# Altium PCB driver_sapog_compact.PcbDoc (part 2 of 2)
Units mil, origin at the board's own origin, x right, y up, seen from the top; angles counter-clockwise.
Board outline 2630 x 2261.5 mil, 4 copper layers (Top Layer, Mid-Layer 1, Mid-Layer 2, Bottom Layer); 113 components, 104 nets, 394 pads, 280 vias.
Unrouted connection lines stored in the file: 128.
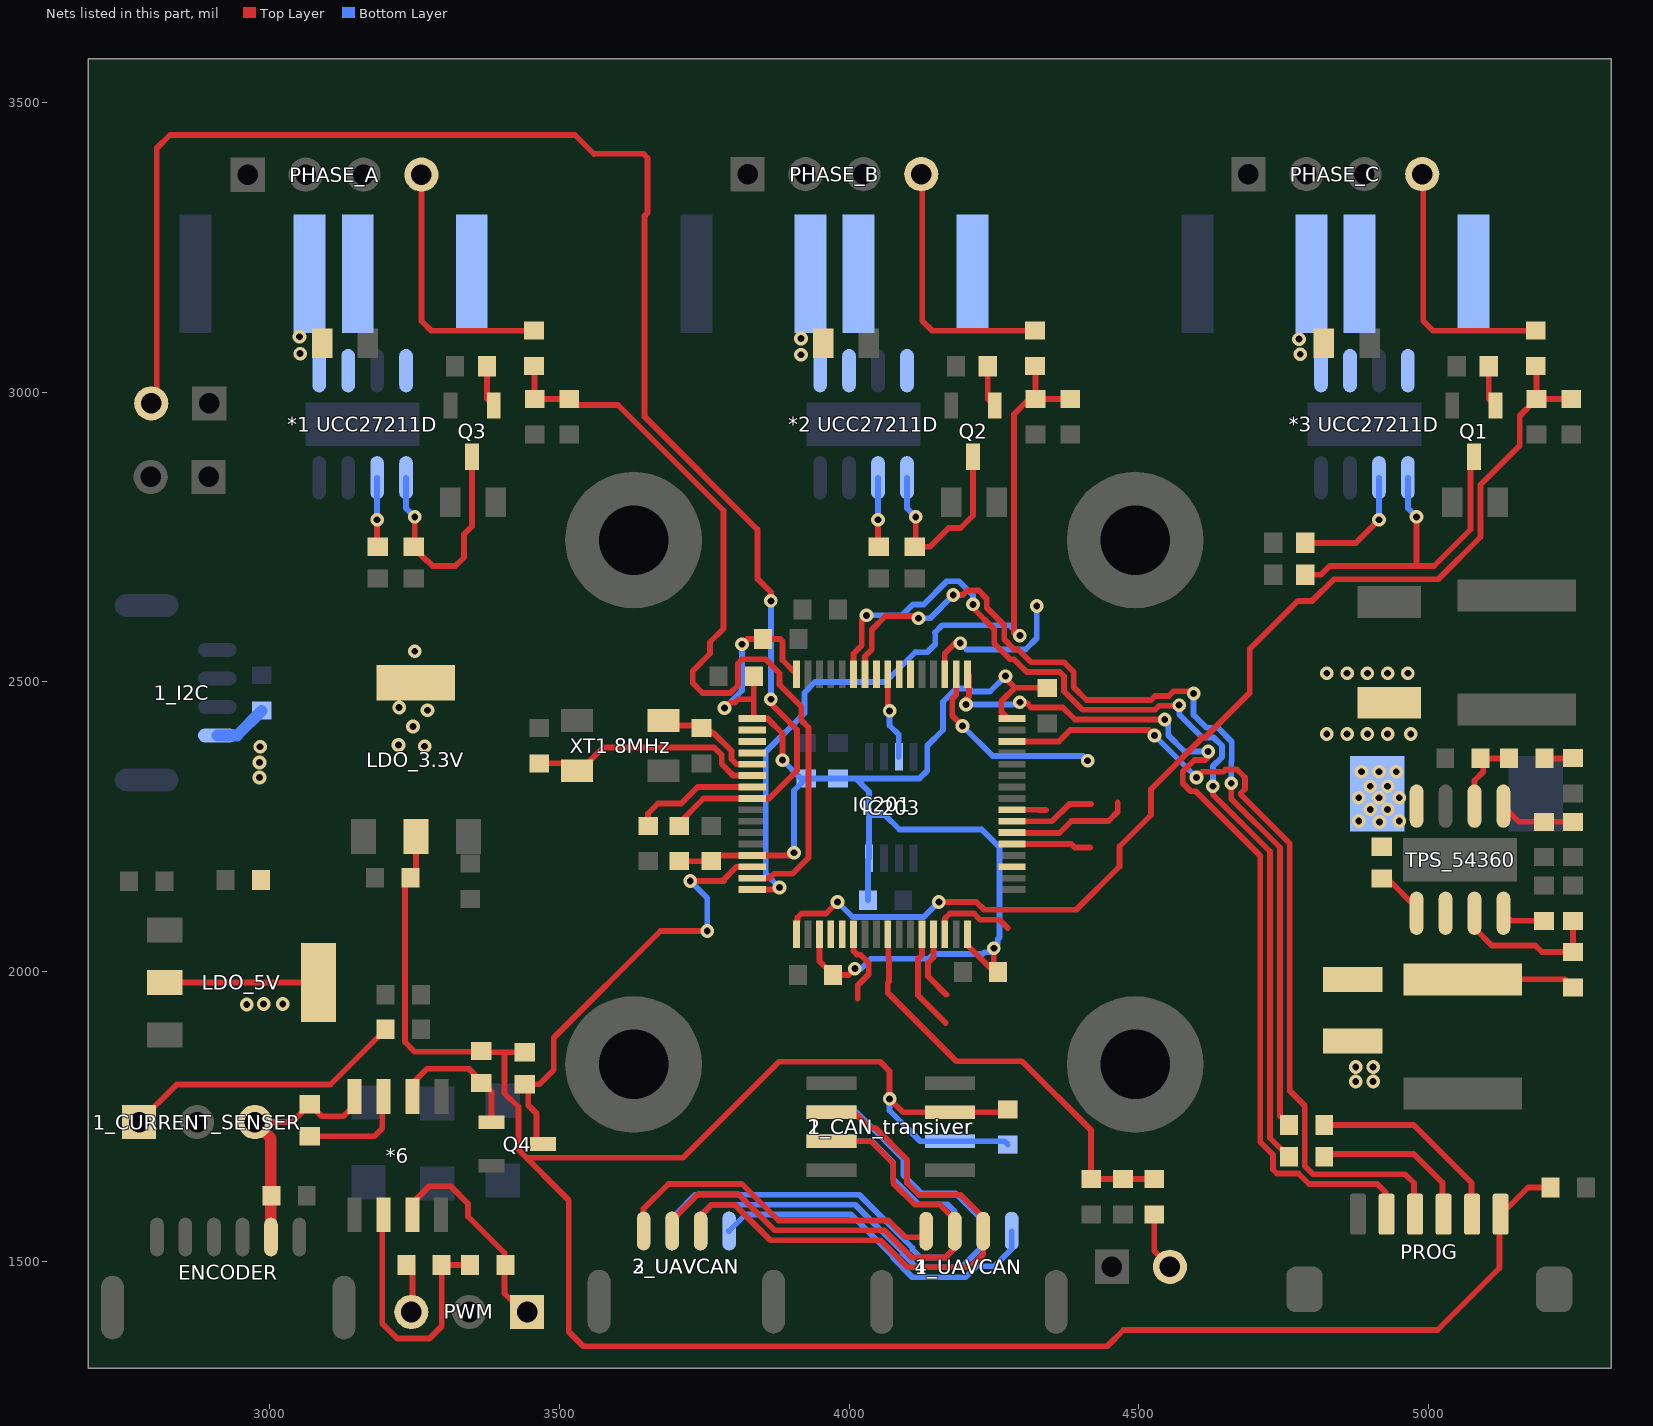
[diagram p2: the nets of this part, all layers, seen from the top]

## Via types
v1: diameter 23.62/0/23.62/23.62 (per signal layer), hole 11.81, Top Layer to Bottom Layer, 278 vias
v2: diameter 39.37, hole 39.37, Top Layer to Bottom Layer, tented both sides, 2 vias

## Nets (pads, with @x,y where several pads share a name; then routed paths per layer and width w, separated by ;. In a path a pad name is that pad's centre, name@x,y a point inside that pad or via, vN(x,y) a via of type N, cw(c..) or ccw(c..) an arc to the next point about the centre after c; other vN are vias at no path point) (continued)
Net1_CAN_transiver_6: 1_CAN_transiver.6 1_UAVCAN.3 2_UAVCAN.3 | length 1001.1
  Top Layer w10: 2_UAVCAN.3@3743.61,1551.88 3743.61,1578.61 3762.35,1597.35 3802.68,1597.35 3864.03,1536 4054.22,1536 4101.11,1489.11 4209.1,1489.11 4231.61,1511.61 1_UAVCAN.3@4231.61,1551.57 4231.61,1575.39 4192.97,1614.04 4120.92,1614.04 4100,1634.96 4100,1675 4045,1730 4035,1730 4008,1757 1_CAN_transiver.6@3969.64,1757
Net1_CAN_transiver_7: 1_CAN_transiver.7 1_UAVCAN.2 2_UAVCAN.2 | length 915.7
  Top Layer w10: 2_UAVCAN.2@3694.39,1551.88 3694.39,1570.39 3740,1616 3808.07,1616 3871.07,1553 4061.26,1553 4108.15,1506.11 4166.1,1506.11 4181.1,1521.11 4181.1,1550.29 1_UAVCAN.2@4182.39,1551.57 4182.39,1571.6 4156.95,1597.04 4113.88,1597.04 4076.39,1634.53 4076.39,1668.61 4038,1707 1_CAN_transiver.7@3969.64,1707
Net1_CURRENT_SENCE_1: 1_CURRENT_SENSER.1 R27.1 | length 491.8
  Top Layer w10: 1_CURRENT_SENSER.1@2774,1740 2839,1805 3104.49,1805 R27.1@3199.49,1900
Net1_UAVCAN_1: 1_UAVCAN.1 2_UAVCAN.1 | length 586.5
  Top Layer w10: 2_UAVCAN.1@3645.18,1551.88 3645.18,1590.18 3688,1633 3815.12,1633 3878.12,1570 4068.3,1570 4097.3,1541 4122.61,1541 1_UAVCAN.1@4133.18,1551.57
Net2_CAN_transiver_6: 2_CAN_transiver.6 3_UAVCAN.3 4_UAVCAN.3 | length 926.4
  Bottom Layer w10: 3_UAVCAN.3@3694.39,1551.88 3700.53,1551.88 3700.53,1580.54 3734.35,1614.35 4017.65,1614.35 4109.37,1522.63 4109.37,1520.05 4123.32,1506.11 4166.1,1506.11 4182.39,1522.39 4_UAVCAN.3@4182.39,1551.57 4182.39,1585.61 4170,1598 4120,1598 4076.39,1641.61 4076.39,1669.57 4038.96,1707 2_CAN_transiver.6@3969.64,1707
Net2_CAN_transiver_7: 2_CAN_transiver.7 3_UAVCAN.2 4_UAVCAN.2 | length 984.3
  Bottom Layer w10: 3_UAVCAN.2@3743.61,1551.88 3745.53,1551.88 3745.53,1580.54 3762.35,1597.35 4010.61,1597.35 4092.37,1515.59 4092.37,1513.01 4116.28,1489.11 4194.1,1489.11 4231.61,1526.61 4_UAVCAN.2@4231.61,1551.57 4231.61,1569.39 4183.96,1617.04 4125,1617.04 4093.39,1648.65 4093.39,1676.61 4013,1757 2_CAN_transiver.7@3969.64,1757
Net3_UAVCAN_1: 3_UAVCAN.1 4_UAVCAN.1 | length 597.1
  Bottom Layer w10: 3_UAVCAN.1@3792.82,1551.88 3821.28,1580.35 4003.57,1580.35 4075.37,1508.55 4075.37,1505.97 4109.23,1472.11 4201.15,1472.11 4220.04,1491 4251,1491 4280.82,1520.82 4_UAVCAN.1@4280.82,1551.57
"Net*1 UCC27211D_1": "*1 UCC27211D.1" C30.1 L6.1
  other v1: 3052,3067 3051,3096
"Net*1 UCC27211D_2": "*1 UCC27211D.2" C31.1
"Net*1 UCC27211D_5": "*1 UCC27211D.5" Q3.3 R21.1 | length 413.5
  Top Layer w10: v1(3250,2785) 3250,2735.56 R21.1@3248,2733.56 3248,2732 3270.81,2709.19 3271.93,2709.19 3281.12,2700 3320,2700 3335,2715 3335,2755 3349,2769 Q3.3@3349,2888.71
  Bottom Layer w10: 3235,2852.48 3235,2800 v1(3250,2785)
"Net*1 UCC27211D_6": "*1 UCC27211D.6" R22.1 | length 119.3
  Top Layer w10: v1(3185,2780) 3185,2734.56 R22.1@3186,2733.56
  Bottom Layer w10: v1(3185,2780) 3185,2852.48
"Net*2 UCC27211D_1": "*2 UCC27211D.1" C25.1 L4.1
  other v1: 3917,3065 3917,3093
"Net*2 UCC27211D_2": "*2 UCC27211D.2" C27.1
"Net*2 UCC27211D_5": "*2 UCC27211D.5" Q2.3 R16.1 | length 335.8
  Top Layer w10: v1(4115,2785) 4115,2735.56 R16.1@4113,2733.56 4139.56,2733.56 4172,2766 4192.54,2766 4214,2787.46 Q2.3@4214,2874
  Bottom Layer w10: 4100,2852.48 4100,2800 v1(4115,2785)
"Net*2 UCC27211D_6": "*2 UCC27211D.6" R17.1 | length 119.3
  Top Layer w10: v1(4050,2780) 4050,2734.56 R17.1@4051,2733.56
  Bottom Layer w10: v1(4050,2780) 4050,2852.48
"Net*3 UCC27211D_1": "*3 UCC27211D.1" C21.1 L2.1
  other v1: 4779,3066 4777,3092
"Net*3 UCC27211D_2": "*3 UCC27211D.2" C22.1
"Net*3 UCC27211D_5": "*3 UCC27211D.5" Q1.3 R11.1 | length 604.6
  Top Layer w10: R11.1@4787.56,2685 4815,2685 4830,2700 4980,2700 ; v1(4980,2785) 4980,2700 ; Q1.3@5079,2888.71 5073.28,2882.99 5073.28,2763.28 5010,2700 4980,2700
  Bottom Layer w10: 4965,2852.48 4965,2800 v1(4980,2785)
"Net*3 UCC27211D_6": "*3 UCC27211D.6" R12.1 | length 216.5
  Top Layer w10: R12.1@4787.56,2740 4875,2740 v1(4915,2780)
  Bottom Layer w10: v1(4915,2780) 4915,2852.48
Net*6_2: *6.2 C33.2 R31.2 | length 449.8
  Top Layer w10: *6.2@3192.49,1561.49 3194,1563 3194,1392 3220,1366 3275,1366 3296.51,1387.51 R31.2@3296.51,1493 C33.2@3345.49,1493
Net*6_3: *6.3 C33.1 PWM.1 | length 397.3
  Top Layer w10: *6.3@3244,1563 3244,1598 3275,1629 3312,1629 3342,1599 3342,1577 3405,1514 3405,1444 PWM.1@3446,1403
Net*6_6: *6.6 Q4.1 R30.2 | length 257.5
  Top Layer w10: *6.6@3244,1767 3244,1804.96 3271.04,1832 3343.44,1832 3382.71,1792.73 Q4.1@3382.71,1739.4
Net*6_7: *6.7 R29.2 | length 168.6
  Top Layer w10: R29.2@3069,1715.44 3180.44,1715.44 3194,1729 *6.7@3194,1767
NetC1_1: C1.1 TPS_54360.1 | length 90.4
  Top Layer w10: C1.1@4920,2160.44 4929.56,2160.44 4980,2110 TPS_54360.1@4980,2100.48
NetC1_2: C1.2 D1.2 L1.1 TPS_54360.8
  other v1: 4916,2258 4880,2260 4950,2260 4900,2280 4930,2280 4880,2300 4915,2300 4950,2300 4900,2320 4930,2320 4885,2345 4915,2345 4945,2345 4825,2410 4860,2410 4895,2410 4930,2410 4970,2410 4825,2515 4860,2515 4895,2515 4930,2515 4965,2515
NetC4_2: C4.2 R1.1 R2.2 TPS_54360.2 | length 195.8
  Top Layer w10: C4.2@5060,1986.43 5236.06,1986.43 R2.2@5250,1972.49
NetC6_1: C6.1 R3.2 TPS_54360.6 | length 139.5
  Top Layer w10: TPS_54360.6@5080,2285.52 5080,2330 5095,2345 5095,2363.51 C6.1@5090.51,2368 R3.2@5139.49,2368
NetC7_1: C7.1 R3.1 | length 49.7
  Top Layer w10: R3.1@5200.51,2368 5249.49,2368 C7.1@5250,2368.51
NetPROG_2: PROG.2 R200.1 | length 353.5
  Top Layer w10: R200.1@4820.51,1735 4975,1735 5075,1635 5075,1579.04 PROG.2@5073.82,1577.86
NetPROG_3: PROG.3 R201.1 | length 284.2
  Top Layer w10: R201.1@4820.51,1680 4825.51,1685 4975,1685 5024.61,1635.39 PROG.3@5024.61,1577.86
NetPWM_3: PWM.3 R31.1 | length 94.4
  Top Layer w10: R31.1@3235.49,1493 3246,1482.49 PWM.3@3246,1403
NetQ1_1: Q1.1 R14.1 | length 72.6
  Top Layer w10: R14.1@5104.56,3045 5104.56,2989.13 Q1.1@5116.4,2977.29
NetQ2_1: Q2.1 R19.1 | length 72.6
  Top Layer w10: R19.1@4239.56,3045 4239.56,2989.13 Q2.1@4251.4,2977.29
NetQ3_1: Q3.1 R25.1 | length 72.6
  Top Layer w10: R25.1@3374.56,3045 3374.56,2989.13 Q3.1@3386.4,2977.29
NetR2_1: R2.1 R7.2 TPS_54360.3 | length 266.6
  Top Layer w10: TPS_54360.3@5080,2100.48 5080,2075 5110,2045 5185,2045 5196.49,2033.51 R2.1@5250,2033.51 R7.2@5250,2087.49
NetR4_1: R4.1 R6.2 TPS_54360.5 | length 131.2
  Top Layer w10: TPS_54360.5@5130,2285.52 5157.01,2258.51 R4.1@5250,2258.51
NetR5_1: R5.1 TPS_54360.4 | length 75.4
  Top Layer w10: TPS_54360.4@5130,2100.48 5142.99,2087.49 R5.1@5200,2087.49
NRST: IC201.7 R8.2 | length 219.9
  Top Layer w10: R8.2@3653,2251.51 3653,2273 3670,2290 3710,2290 3738.53,2318.53 IC201.7@3832.59,2318.53
OSC_IN_STM: "XT1 8MHz.3" C12.2 IC201.5 | length 186.8
  Top Layer w10: 3685.8,2434.31 3695.11,2425 3750.51,2425 3764.01,2411.5 3766.5,2411.5 3796.97,2381.03 3796.97,2366.7 3805.77,2357.9 IC201.5@3832.59,2357.9
OVER_T: IC201.8 R205.1 TERMO_FUSE.2 | length 2731.3
  Top Layer w10: TERMO_FUSE.2@2785,2987 2804.53,3006.53 2804.53,3421.53 2827.53,3444.53 3526.59,3444.53 3559.57,3411.54 3560.03,3412 3644.97,3412 3652,3404.97 3652,3310.03 3646.97,3305 3646.97,2958.03 3842,2763 3842,2678 3865,2655 v1(3865,2640) ; R205.1@3707,2251.51 3707,2257 3748.84,2298.84 IC201.8@3832.59,2298.84 3862.05,2298.84 3910,2346.79 3910,2417.28 3865,2462.28 v1(3865,2470)
  Bottom Layer w10: v1(3865,2470) v1(3865,2640)
PA_6: IC201.22 | length 133.5
  Top Layer w10: IC201.22@4007.79,2064.59 4007.79,2035.21 4014.19,2028.81 4019.86,2028.81 4033.81,2014.86 4033.81,1995.14 4015,1976.33 4015,1953
PA_15: IC201.50 | length 340.4
  Top Layer w10: IC201.50@4184.95,2513.41 4184.95,2477.62 4178.19,2470.86 4178.19,2441.81 v1(4196,2424)
  Bottom Layer w10: v1(4196,2424) 4248,2372 4404,2372 v1(4412,2364)
PB_2: IC201.28 | length 176.2
  Top Layer w10: IC201.28@4125.9,2064.59 4125.9,2028.62 4119.19,2021.9 4119.19,1958.81 4167,1911
PB_3: IC201.55
PB_5: IC201.57
PB_10: IC201.29 | length 121.7
  Top Layer w10: IC201.29@4145.58,2064.59 4145.58,2024.25 4136.19,2014.86 4136.19,1991.81 4168,1960
PB_11: IC201.30 | length 149.6
  Top Layer w10: IC201.30@4165.27,2064.59 4165.27,2091.41 4174.07,2100.21 4215.52,2100.21 4226.27,2089.45 4259.55,2089.45 4274,2075
PB_14: IC201.35
PC_6: IC201.37 | length 137.1
  Top Layer w10: IC201.37@4281.41,2220.1 4383.57,2220.1 4389.67,2214 4416,2214
PC_7: IC201.38 | length 214.1
  Top Layer w10: IC201.38@4281.41,2239.79 4282.01,2239.19 4363.19,2239.19 4384,2260 4448,2260 4464,2276 4464,2292
PC_8: IC201.39 | length 148.8
  Top Layer w10: IC201.39@4281.41,2259.47 4350.47,2259.47 4380,2289 4418,2289
PC_10: IC201.51 | length 270
  Top Layer w10: IC201.51@4165.27,2513.41 4165.27,2549.27 4183,2567 v1(4192,2567)
  Bottom Layer w10: v1(4192,2567) 4202.81,2556.19 4304.86,2556.19 4324,2575.33 v1(4324,2631)
PC_13: IC201.2
PC_14: IC201.3
PC_15: IC201.4
PD_2: IC201.54
PHASE_A: "*1 UCC27211D.4" C31.2 PHASE_A.4 R23.1 | length 454
  Top Layer w10: PHASE_A.4@3261.5,3376 3261.5,3123.5 3278.49,3106.51 R23.1@3456,3106.51
PHASE_B: "*2 UCC27211D.4" C27.2 PHASE_B.4 R18.1 | length 454
  Top Layer w10: PHASE_B.4@4126.5,3376 4126.5,3123.5 4143.49,3106.51 R18.1@4321,3106.51
PHASE_C: "*3 UCC27211D.4" C22.2 PHASE_C.4 R13.1 | length 454
  Top Layer w10: PHASE_C.4@4991.5,3376 4991.5,3123.5 5008.49,3106.51 R13.1@5186,3106.51
PWM_ext: IC201.14 Q4.3 R28.2 | length 791.3
  Top Layer w10: Q4.3@3471.29,1702 3460,1713.29 3460,1755 3446,1769 3446,1799.25 R28.2@3440,1805.25 3465.25,1805.25 3490,1830 3490,1885.58 3674.42,2070 v1(3755,2070) ; v1(3725.75,2156.19) 3783.81,2156.19 3782.52,2157.48 3805.77,2180.73 IC201.14@3832.59,2180.73
  Bottom Layer w10: v1(3725.75,2156.19) 3755,2126.94 v1(3755,2070)
PWM_OUT: IC201.40 | length 58.7
  Top Layer w10: IC201.40@4281.41,2279.16 4326.84,2279.16 4327,2279 4340,2279
Q0: "XT1 8MHz.1" C13.2 IC201.6 | length 412.6
  Top Layer w10: C13.2@3465,2359.49 3517.4,2359.49 3530.2,2346.69 ; 3536.2,2347.69 3575.48,2386.98 3766.98,2386.98 3779.97,2373.99 3779.97,2358.24 3800,2338.21 IC201.6@3832.59,2338.21
SENSE_A: C32.1 IC201.15 R23.2 R24.2 | length 1447.7
  Top Layer w10: R23.2@3456,3045.49 3457,3044.49 R24.2@3457,2988.51 C32.1@3517,2988.51 3527.49,2978.02 3600.98,2978.02 3783,2796 3783,2592.04 3760,2569.04 3760,2549 3730,2519 3730,2497.98 3746.98,2480.99 3794.95,2480.99 3808.02,2494.06 3808.02,2531.98 3815.05,2539.01 3855.97,2539.01 3880,2514.98 3880,2495 3917.5,2457.5 3917.5,2433.83 3930,2421.33 3930,2196.33 3902.48,2168.81 3870.14,2168.81 3862.38,2161.05 IC201.15@3832.59,2161.05
SENSE_B: C28.1 IC201.16 R18.2 R20.2 | length 1418.9
  Top Layer w10: IC201.16@3832.59,2141.36 3876.36,2141.36 v1(3880,2145) ; v1(4295,2580) 4289.43,2580 4284.81,2584.62 4284.81,2605.03 4284.72,2605.13 4284.72,2962.37 4310.86,2988.51 R20.2@4322,2988.51 ; R18.2@4321,3045.49 4322,3044.49 R20.2@4322,2988.51 ; C28.1@4382,2988.51 R20.2@4322,2988.51
  Bottom Layer w10: v1(3880,2145) 3856.19,2168.81 3856.19,2379.43 3922.81,2446.05 3922.81,2481.48 3941.33,2500 4063.08,2500 4114.7,2551.62 4115.14,2551.19 4134.86,2551.19 4148.81,2565.14 4148.81,2584.86 4148.38,2585.3 4161.08,2598 4277,2598 v1(4295,2580)
SENSE_C: C23.1 IC201.17 R13.2 R15.2 | length 2001.3
  Top Layer w10: IC201.17@3909.36,2064.59 3909.36,2087.19 3910.27,2087.19 3911.14,2088.06 3911.14,2093.18 3918.17,2100.21 3960.21,2100.21 v1(3980,2120) ; v1(4155,2120) 4219.77,2120 4233.31,2106.45 4392.37,2106.45 4467,2181.08 4467,2215.99 4521.19,2270.18 4521.19,2314.86 4607.36,2401.03 4607.36,2403.81 ; 4608.75,2402.42 4610.14,2403.81 4614.4,2403.81 4692,2481.41 4692,2557 4775,2640 4800,2640 4837.5,2677.5 5017.5,2677.5 5090.28,2750.28 5090.28,2840.56 5157.99,2908.27 5157.99,2959.5 R15.2@5187,2988.51 ; R13.2@5186,3045.49 5187,3044.49 R15.2@5187,2988.51 ; C23.1@5247,2988.51 R15.2@5187,2988.51
  Bottom Layer w10: v1(3980,2120) 4006.01,2093.99 4128.99,2093.99 v1(4155,2120)
SENSE_CURRENT: IC201.21
SENSE_VIN: IC201.20
SWCLK: IC201.49 PROG.5 | length 1594.7
  Top Layer w10: v1(4202,2461) 4202,2469.96 4206.98,2474.94 4206.98,2511.07 IC201.49@4204.64,2513.41 ; v1(4295,2465) 4305,2465 4314.02,2455.98 4369.02,2455.98 4390,2435 v1(4545,2435) ; v1(4620,2380) 4620,2370 4615,2365 4596.33,2365 4576.19,2344.86 4576.19,2325.14 4590.14,2311.19 4598.81,2311.19 4710,2200 4710,1705.45 4732,1683.45 4732,1658.02 4739.03,1650.99 4776.01,1650.99 4794,1633 4912,1633 4926.18,1618.82 PROG.5@4926.18,1577.86
  Bottom Layer w10: v1(4202,2461) 4291,2461 v1(4295,2465) ; v1(4545,2435) 4551.19,2428.81 4551.19,2407.85 4579.04,2380 v1(4620,2380)
SWDIO: IC201.46 PROG.4 | length 1436.3
  Top Layer w10: IC201.46@4281.41,2397.27 4362.27,2397.27 4382,2417 4518,2417 v1(4527.38,2407.62) v1@4530,2405 ; v1(4600,2335) 4610,2345 4646.33,2345 4650.14,2348.81 4669.86,2348.81 4683.81,2334.86 4683.81,2315.14 4677,2308.33 4677,2305.12 4761,2221.12 4761,1794 4786.98,1768.02 4786.98,1664.06 4801.04,1650 4960,1650 4975.39,1634.61 PROG.4@4975.39,1577.86
  Bottom Layer w10: v1(4527.38,2407.62) v1(4600,2335)
TSENS_OS: IC201.56 IC203.3 | length 150.7
  Top Layer w10: IC201.56@4066.84,2513.41 4066.84,2453.16 v1(4070,2450)
  Bottom Layer w10: v1(4070,2450) 4070,2425 4085.8,2409.2 IC203.3@4085.8,2370.6
USART1_RX: IC201.59 R201.2 | length 1695.7
  Top Layer w10: IC201.59@4007.79,2513.41 4007.79,2548.75 4022,2562.96 4022,2607 v1(4030,2615) ; v1(4214,2634) 4214,2627.76 4250.81,2590.95 4250.81,2566.47 4278.1,2539.19 4284.81,2539.19 4307,2517 4363.98,2517 4371.01,2509.97 4371.01,2483.95 4402.96,2452 4528.33,2452 4535.14,2458.81 4568.81,2458.81 v1(4570,2460) ; v1(4628.19,2319.88) 4628.19,2305.85 4727,2207.04 4727,1712.49 R201.2@4759.49,1680
  Bottom Layer w10: v1(4030,2615) 4091.33,2615 4110.14,2633.81 4128.81,2633.81 4168.81,2673.81 4189.86,2673.81 4214,2649.67 v1(4214,2634) ; v1(4570,2460) 4570,2443.96 4610.15,2403.81 4629.86,2403.81 4643.81,2389.86 4643.81,2370.14 4628.19,2354.52 v1(4628.19,2319.88)
USART1_TX: IC201.58 R200.2 | length 1618.8
  Top Layer w10: IC201.58@4027.47,2513.41 4027.47,2544.39 4039,2555.92 4039,2590 4062.81,2613.81 4116.19,2613.81 v1(4120,2610) ; v1(4180,2650) 4196.33,2650 4204.14,2657.81 4223.86,2657.81 4237.81,2643.86 4237.81,2627.99 4267.81,2597.99 4267.81,2573.52 4285.14,2556.19 4291.85,2556.19 4314.04,2534 4371.02,2534 4388.01,2517.02 4388.01,2490.99 4410,2469 4521.28,2469 4528.1,2475.81 4552.14,2475.81 4560.14,2483.81 4591.19,2483.81 v1(4595,2480) ; v1(4660,2325) 4660,2298.08 4744,2214.08 4744,1750.49 R200.2@4759.49,1735
  Bottom Layer w10: v1(4120,2610) 4140,2610 v1(4180,2650) ; v1(4595,2480) 4595,2443 4617.19,2420.81 4636.9,2420.81 4660.81,2396.9 4660.81,2363.1 4660,2362.28 v1(4660,2325)
V_SENSE: C18.2 IC201.25 R9.2 R10.1 | length 746
  Top Layer w10: IC201.25@4066.84,2064.59 4067.81,2063.62 4067.81,2023.74 4069.14,2022.41 4069.14,1982.38 4066.84,1980.08 4066.84,1963.16 4185,1845 4298.67,1845 4418,1725.67 C18.2@4418,1641.51 R10.1@4473,1641.51 R9.2@4527,1641.51
VCC_3.3: 1_CAN_transiver.3 2_CAN_transiver.3 C2.2 C5.2 C8.2 C9.2 C10.2 C11.2 C17.2 C19.1 C24.1 C26.2 C29.1 IC201.1 IC201.13 IC201.19 IC201.32 IC201.48 IC201.64 IC203.8 LDO_3.3V.2 LDO_3.3V.4 PROG.1 R28.1 R30.1 R202.1 R203.1 R205.2 | length 6866.6
  Top Layer w10: LDO_3.3V.2@3252,2233.13 3252,2171.49 C17.2@3242.51,2162 3233.02,2152.51 3233.02,1878.02 3249.48,1861.56 3369,1861.56 3370,1860.56 3405,1860.56 ; R28.1@3432,1860.56 3405,1860.56 ; 3443.68,1678.19 3713.19,1678.19 3879,1844 4053.67,1844 4070,1827.67 v1(4070,1780) 4093,1757 1_CAN_transiver.3@4174.36,1757 4269.49,1757 C26.2@4274,1761.51 ; R205.2@3707,2190.49 C10.2@3762,2190.49 3771.93,2200.42 IC201.13@3832.59,2200.42 3900.42,2200.42 v1(3905,2205) ; v1(3785,2455) 3793.99,2463.99 3801.99,2463.99 3808,2470 3835.51,2470 ; v1(3815,2565) 3824,2574 C11.2@3851.49,2574 3881,2574 3885.02,2569.98 3885.02,2537.75 IC201.64@3909.36,2513.41 ; C8.2@3835.51,2510 3835.51,2470 ; v1(3885,2365) 3885,2411.04 3859.4,2436.64 IC201.1@3832.59,2436.64 3835.51,2439.56 3835.51,2470 ; IC201.19@3948.73,2064.59 3948.73,2017.78 C9.2@3972.51,1994 3999,1994 v1(4010,2005) ; IC201.32@4204.64,2064.59 4204.64,2045.36 C2.2@4250,2000 ; v1(4250,2040) C2.2@4250,2000 ; C2.2@4257.51,1999 4251,1999 C2.2@4250,2000 ; v1(4270,2510) 4270,2506.33 4286.33,2490 ; IC201.48@4281.41,2436.64 4274.69,2436.64 4262.79,2448.54 4262.79,2466.46 4286.33,2490 ; C5.2@4342,2489.51 4341.51,2490 4286.33,2490 ; C24.1@5211.49,1627 5172.17,1627 5123.03,1577.86 5123.03,1488.03 5016,1381 4474,1381 4446,1353 3541,1353 3516,1378 3516,1605 3429,1692 3429,1765.82 3405,1789.82 3405,1860.56
  Bottom Layer w10: v1(3785,2455) 3815,2485 v1(3815,2565) ; v1(3885,2365) 3916.51,2333.49 R203.1@3926,2333.49 ; v1@3905,2210 3905,2312.49 R203.1@3926,2333.49 ; v1(4010,2005) 4020.96,2005 4037.96,2022 4137,2022 4145,2030 4230.96,2030 4234.15,2033.19 4243.19,2033.19 v1(4250,2040) 4256.81,2046.81 4256.81,2055.85 4260,2059.04 4260,2214.04 4229.04,2245 4087,2245 4062,2270 4034.61,2270 ; C19.1@4032.49,2123 4032.49,2193.28 IC203.8@4034.61,2195.4 4034.61,2270 ; v1(4070,1780) 4070,1760 4123,1707 2_CAN_transiver.3@4174.36,1707 4268.49,1707 C29.1@4274,1701.49 ; v1(4270,2510) 4243.5,2483.5 4213.17,2483.5 4207.86,2488.81 4185.14,2488.81 4162,2465.67 4162,2417 4135,2390 4135,2346.73 4121.76,2333.49 4011.51,2333.49 ; R203.1@3926,2333.49 R202.1@3981,2333.49 4011.51,2333.49 ; 4011.51,2333.49 4034.61,2310.39 4034.61,2270
  other v1: 3267,2389 3222,2391 3247,2423 3272,2451 3223,2456 3250,2553
VCC_5: 1_CURRENT_SENSER.3 1_I2C.1 *6.8 C16.2 C20.2 C34.2 ENCODER.5 LDO_5V.2 LDO_5V.4 R29.1 | length 768.6
  Top Layer w10: LDO_5V.2@2818.13,1981 LDO_5V.4@3083.87,1981 ; 1_CURRENT_SENSER.3@2974,1740 3038.44,1740 R29.1@3069,1770.56 3089.56,1750 3127,1750 *6.8@3144,1767
  Top Layer w20: 1_CURRENT_SENSER.3@2974,1740 3001.61,1712.39 ENCODER.5@3001.61,1541.57
  Bottom Layer w20: 1_I2C.1@2909,2407.57 2943.08,2407.57 C20.2@2986,2450.49
  other v1: 2960,1943 2989,1944 3022,1944 2982,2335 2982,2361 2983,2388
VCC_50v: P1.2 R1.2 R9.1 | length 101.5
  Top Layer w10: R9.1@4527,1580.49 4527,1517.18 P1.2@4554,1490.17
  other v1: 4875,1810 4905,1810 4875,1835 4905,1835
pads on no net: 1_CAN_transiver.5 1_CAN_transiver.8 1_I2C.M$0 1_I2C.M$1 1_UAVCAN.M$0 1_UAVCAN.M$1 2_CAN_transiver.5 2_CAN_transiver.8 2_UAVCAN.M$0 2_UAVCAN.M$1 3_UAVCAN.M$0 3_UAVCAN.M$1 4_UAVCAN.M$0 4_UAVCAN.M$1 *6.1 *6.4 ENCODER.1 ENCODER.7 ENCODER.8 PROG.M PWM.2

## Polygon pours and split planes (outlines as drawn)
GND on Bottom Layer "Top Layer-No Net" (solid, pour order 210): 2687,3576 2686.5,3575.5 2686.5,1314.5 5316,1314.5 5316,3575.5
VCC_50v on Bottom Layer "Top Layer-No Net" (solid, pour order 204): 4515,1545 4515,1440 4705,1440 4950,1685 4950,1860 4935,1875 4835,1875 4835,1715 4665,1545
GND_C on Bottom Layer "Top Layer-No Net" (solid, pour order 194): 5265,3505 5265,2900 4615,2900 4540,2975 4540,3505
"Net*3 UCC27211D_2" on Bottom Layer "Top Layer-No Net" (solid, pour order 188): 4845,2985 4890,2985 4890,3085 4910,3105 4910,3315 4845,3315
no net on Bottom Layer "Top Layer-No Net" (solid, pour order 186): 4890,2992.4
HO_C on Bottom Layer "Top Layer-No Net" (solid, pour order 184): 4895,2992.4 4940,2992.4 4940,3060 4975,3095 4975,3420 4840,3420 4840,3325 4920,3325 4920,3100 4895,3075
PHASE_C on Bottom Layer "Top Layer-No Net" (solid, pour order 182): 4945,2992.4 5067.4,2992.4 5110,3035 5110,3420 4975,3420 4975,3085 4945,3055
"Net*3 UCC27211D_1" on Bottom Layer "Top Layer-No Net" (solid, pour order 180): 4840,2992.4 4840,3315 4765,3315 4765,3020 4792.6,2992.4
GND_C on Bottom Layer "Top Layer-No Net" (solid, pour order 176): 4840,2785 4890,2785 4890,2905 4840,2905
LO_C on Bottom Layer "Top Layer-No Net" (solid, pour order 174): 4840,2785 4735,2785 4720,2800 4720,2900 4840,2900
GND_B on Bottom Layer "Top Layer-No Net" (solid, pour order 172): 4405,3505 4405,2900 3755,2900 3680,2975 3680,3505
"Net*2 UCC27211D_2" on Bottom Layer "Top Layer-No Net" (solid, pour order 166): 3980,2985 4025,2985 4025,3080 4045,3100 4045,3315 3980,3315
no net on Bottom Layer "Top Layer-No Net" (solid, pour order 164): 4025,2992.4
HO_B on Bottom Layer "Top Layer-No Net" (solid, pour order 162): 4035,2992.4 4075,2992.4 4075,3070 4110,3105 4110,3420 3975,3420 3975,3325 4055,3325 4055,3095 4035,3075
PHASE_B on Bottom Layer "Top Layer-No Net" (solid, pour order 160): 4075,2992.4 4202.4,2992.4 4245,3035 4245,3420 4110,3420 4110,3095 4075,3060
"Net*2 UCC27211D_1" on Bottom Layer "Top Layer-No Net" (solid, pour order 158): 3975,2992.4 3975,3315 3900,3315 3900,3020 3927.6,2992.4
GND_B on Bottom Layer "Top Layer-No Net" (solid, pour order 154): 3975,2785 4025,2785 4025,2905 3975,2905
LO_B on Bottom Layer "Top Layer-No Net" (solid, pour order 152): 3975,2785 3870,2785 3855,2800 3855,2895 3975,2895
LO_A on Bottom Layer "Top Layer-No Net" (solid, pour order 86): 3110,2785 3005,2785 2990,2800 2990,2900 3110,2900
GND_A on Bottom Layer "Top Layer-No Net" (solid, pour order 84): 3110,2785 3160,2785 3160,2905 3110,2905
GND_A on Bottom Layer "Top Layer-No Net" (solid, pour order 82): 3545,3505 3545,2900 2895,2900 2820,2975 2820,3505
"Net*1 UCC27211D_1" on Bottom Layer "Top Layer-No Net" (solid, pour order 80): 3110,2992.4 3110,3315 3035,3315 3035,3020 3062.6,2992.4
PHASE_A on Bottom Layer "Top Layer-No Net" (solid, pour order 78): 3210,2992.4 3337.4,2992.4 3380,3035 3380,3420 3245,3420 3245,3105 3210,3070
HO_A on Bottom Layer "Top Layer-No Net" (solid, pour order 74): 3160,2992.4 3210,2992.4 3210,3070 3245,3105 3245,3420 3110,3420 3110,3315 3180,3315 3180,3100 3160,3080
no net on Bottom Layer "Top Layer-No Net" (solid, pour order 72): 3160,2992.4
"Net*1 UCC27211D_2" on Bottom Layer "Top Layer-No Net" (solid, pour order 70): 3115,2985 3160,2985 3160,3080 3180,3100 3180,3315 3115,3315
GND on Top Layer "Top Layer-No Net" (solid, pour order 208): 2687,3576.5 2686.5,3576 2686.5,1315 5316,1315 5316,3576
LO_A on Top Layer "Top Layer-No Net" (solid, pour order 88): 3105,3425 3105,2790 3000,2790 2820,2970 2820,3425
12V on Top Layer "Top Layer-No Net" (solid, pour order 206): 4805,2550 5305,2550 5305,2755 5105,2755 5025,2675 4835,2675 4805,2645
NetC1_2 on Top Layer "Top Layer-No Net" (solid, pour order 196): 4850,2200 4955,2200 4955,2225 4960,2230 5000,2230 5000,2550 4805,2550 4805,2240
GND_C on Top Layer "Top Layer-No Net" (solid, pour order 190): 4855,2710 5060,2710 5060,3015 5040,3035 4855,3035
NetC4_2 on Top Layer "Top Layer-No Net" (solid, pour order 202): 5060,2155 5060,2075 5105,2030 5165,2030 5190,2005 5190,1945 4815,1945 4815,2025 4955,2025 4995,2065 4995,2155
GND on Top Layer "Top Layer-No Net" (solid, pour order 200): 5165,2340 5265,2340 5270,2335 5270,2285 5170,2285 5165,2290
GND on Top Layer "Top Layer-No Net" (solid, pour order 198): 4960,2230 4970.4,2240.4 5000,2240.4 5005,2245.4 5005,2550 5275,2550 5275,2405 5085,2405 5065,2385 5065,2230
LO_C on Top Layer "Top Layer-No Net" (solid, pour order 192): 4835,3425 4835,2790 4730,2790 4550,2970 4550,3425
GND_B on Top Layer "Top Layer-No Net" (solid, pour order 168): 3990,2710 4195,2710 4195,3015 4175,3035 3990,3035
LO_B on Top Layer "Top Layer-No Net" (solid, pour order 170): 3970,3425 3970,2790 3865,2790 3685,2970 3685,3425
GND_A on Top Layer "Top Layer-No Net" (solid, pour order 90): 3125,2710 3330,2710 3330,3015 3310,3035 3125,3035

## Keep-outs
Keep-Out Layer:
  lines w1: 2686.5,1315 ccw(c2687,1315) 2687,1314.5 ; 2686.5,1315 ccw(c2687,1315) 2687,1314.5 ; 2686.5,1315 2686.5,3576 ; 2686.5,3576 cw(c2687,3576) 2687,3576.5 ; 2686.5,3576 cw(c2687,3576) 2687,3576.5 ; 2687,1314.5 5316,1314.5 ; 2687,3576.5 5316,3576.5 ; 5316,1314.5 ccw(c5316,1315) 5316.5,1315 ; 5316,1314.5 ccw(c5316,1315) 5316.5,1315 ; 5316,3576.5 cw(c5316,3576) 5316.5,3576 ; 5316,3576.5 cw(c5316,3576) 5316.5,3576 ; 5316.5,1315 5316.5,3576 ; 2687,1315 2687,3576 5316,3576 5316,1315 2687,1315

## Other copper
Top Layer:
  region net PA_6: 4024,1964 3987,1964 3987,1932 4024,1932
  region net PB_11: 4291,2092 4254,2092 4254,2060 4291,2060
  region net PB_2: 4197,1929 4160,1929 4160,1897 4197,1897
  region net PB_10: 4197,1971 4160,1971 4160,1939 4197,1939
  region net PC_6: 4436,2226 4399,2226 4399,2194 4436,2194
  rectangle net PC_7: 4448,2275 4485,2307
  region net PC_8: 4438,2306 4401,2306 4401,2274 4438,2274
  region net PWM_OUT: 4345,2279 4345,2316 4313,2316 4313,2279
  rectangle net PC_10: 4303.81,2619.99 4340.81,2651.99
  rectangle net PA_15: 4393,2348 4430,2380
  rectangle net VCC_5: 2967,2023 3002,2419
  rectangle net GND: 3082,2150 3189,2325
  rectangle net VCC_3.3: 3208,2204 3287,2567
  rectangle net 12V: 3295,2173 3388,2298
  rectangle net 12V: 2718,1824 2848,1914
  rectangle net VCC_5: 2798,1927 3088,2036
  rectangle net GND: 2866,2826 2924,3011
  rectangle net 12V: 5275,2570 5305,3485
  rectangle net 12V: 3565,3455 5305,3505
  rectangle net 12V: 3565,3430 3640,3505
  rectangle net 12V: 3565,3315 3640,3400
  rectangle net 12V: 4775,2065 4845,2145
  rectangle net VCC_50v: 4815,1790 4935,1935
  rectangle net "Net*3 UCC27211D_1": 4765,3055 4835,3110
  rectangle net "Net*2 UCC27211D_1": 3900,3055 3970,3110
  rectangle net "Net*1 UCC27211D_1": 3035,3055 3105,3110
Bottom Layer:
  rectangle net VCC_5: 2966,2322 3000,2456
  rectangle net VCC_5: 2933,1708 3047,1973
  rectangle net VCC_3.3: 3159,2372 3344,2537
  rectangle net VCC_3.3: 3083,2520 3841,2578
  rectangle net 12V: 3295,2175 3385,2296
  rectangle net 12V: 2723,1824 2850,1912
  rectangle net NetC1_2: 4805,2391 4990,2533
  rectangle net 12V: 3565,3315 3640,3505
  rectangle net 12V: 4775,2070 4845,2145

## Silkscreen, mask and mechanical layers (free items; w line width, h text height)
Top Solder:
  region: 4023,1964 3987,1964 3987,1933 4023,1933
  region: 4290,2092 4254,2092 4254,2061 4290,2061
  region: 4196,1929 4160,1929 4160,1898 4196,1898
  region: 4199,1968 4163,1968 4163,1937 4199,1937
  region: 4432,2229 4396,2229 4396,2198 4432,2198
  rectangle: 4449,2275 4485,2306
  region: 4437,2306 4401,2306 4401,2275 4437,2275
  region: 4345,2280 4345,2316 4314,2316 4314,2280
  rectangle: 4304.81,2619.99 4340.81,2650.99
  rectangle: 4394,2348 4430,2379